# Altium PCB GPS track2_ar.PcbDoc (part 2 of 3)
Units mm, origin at the board's own origin, x right, y up, seen from the top; angles counter-clockwise.
Board outline 100 x 80 mm, 2 copper layers (Top Layer, Bottom Layer); 195 components, 113 nets, 611 pads, 306 vias.
Unrouted connection lines stored in the file: 1.
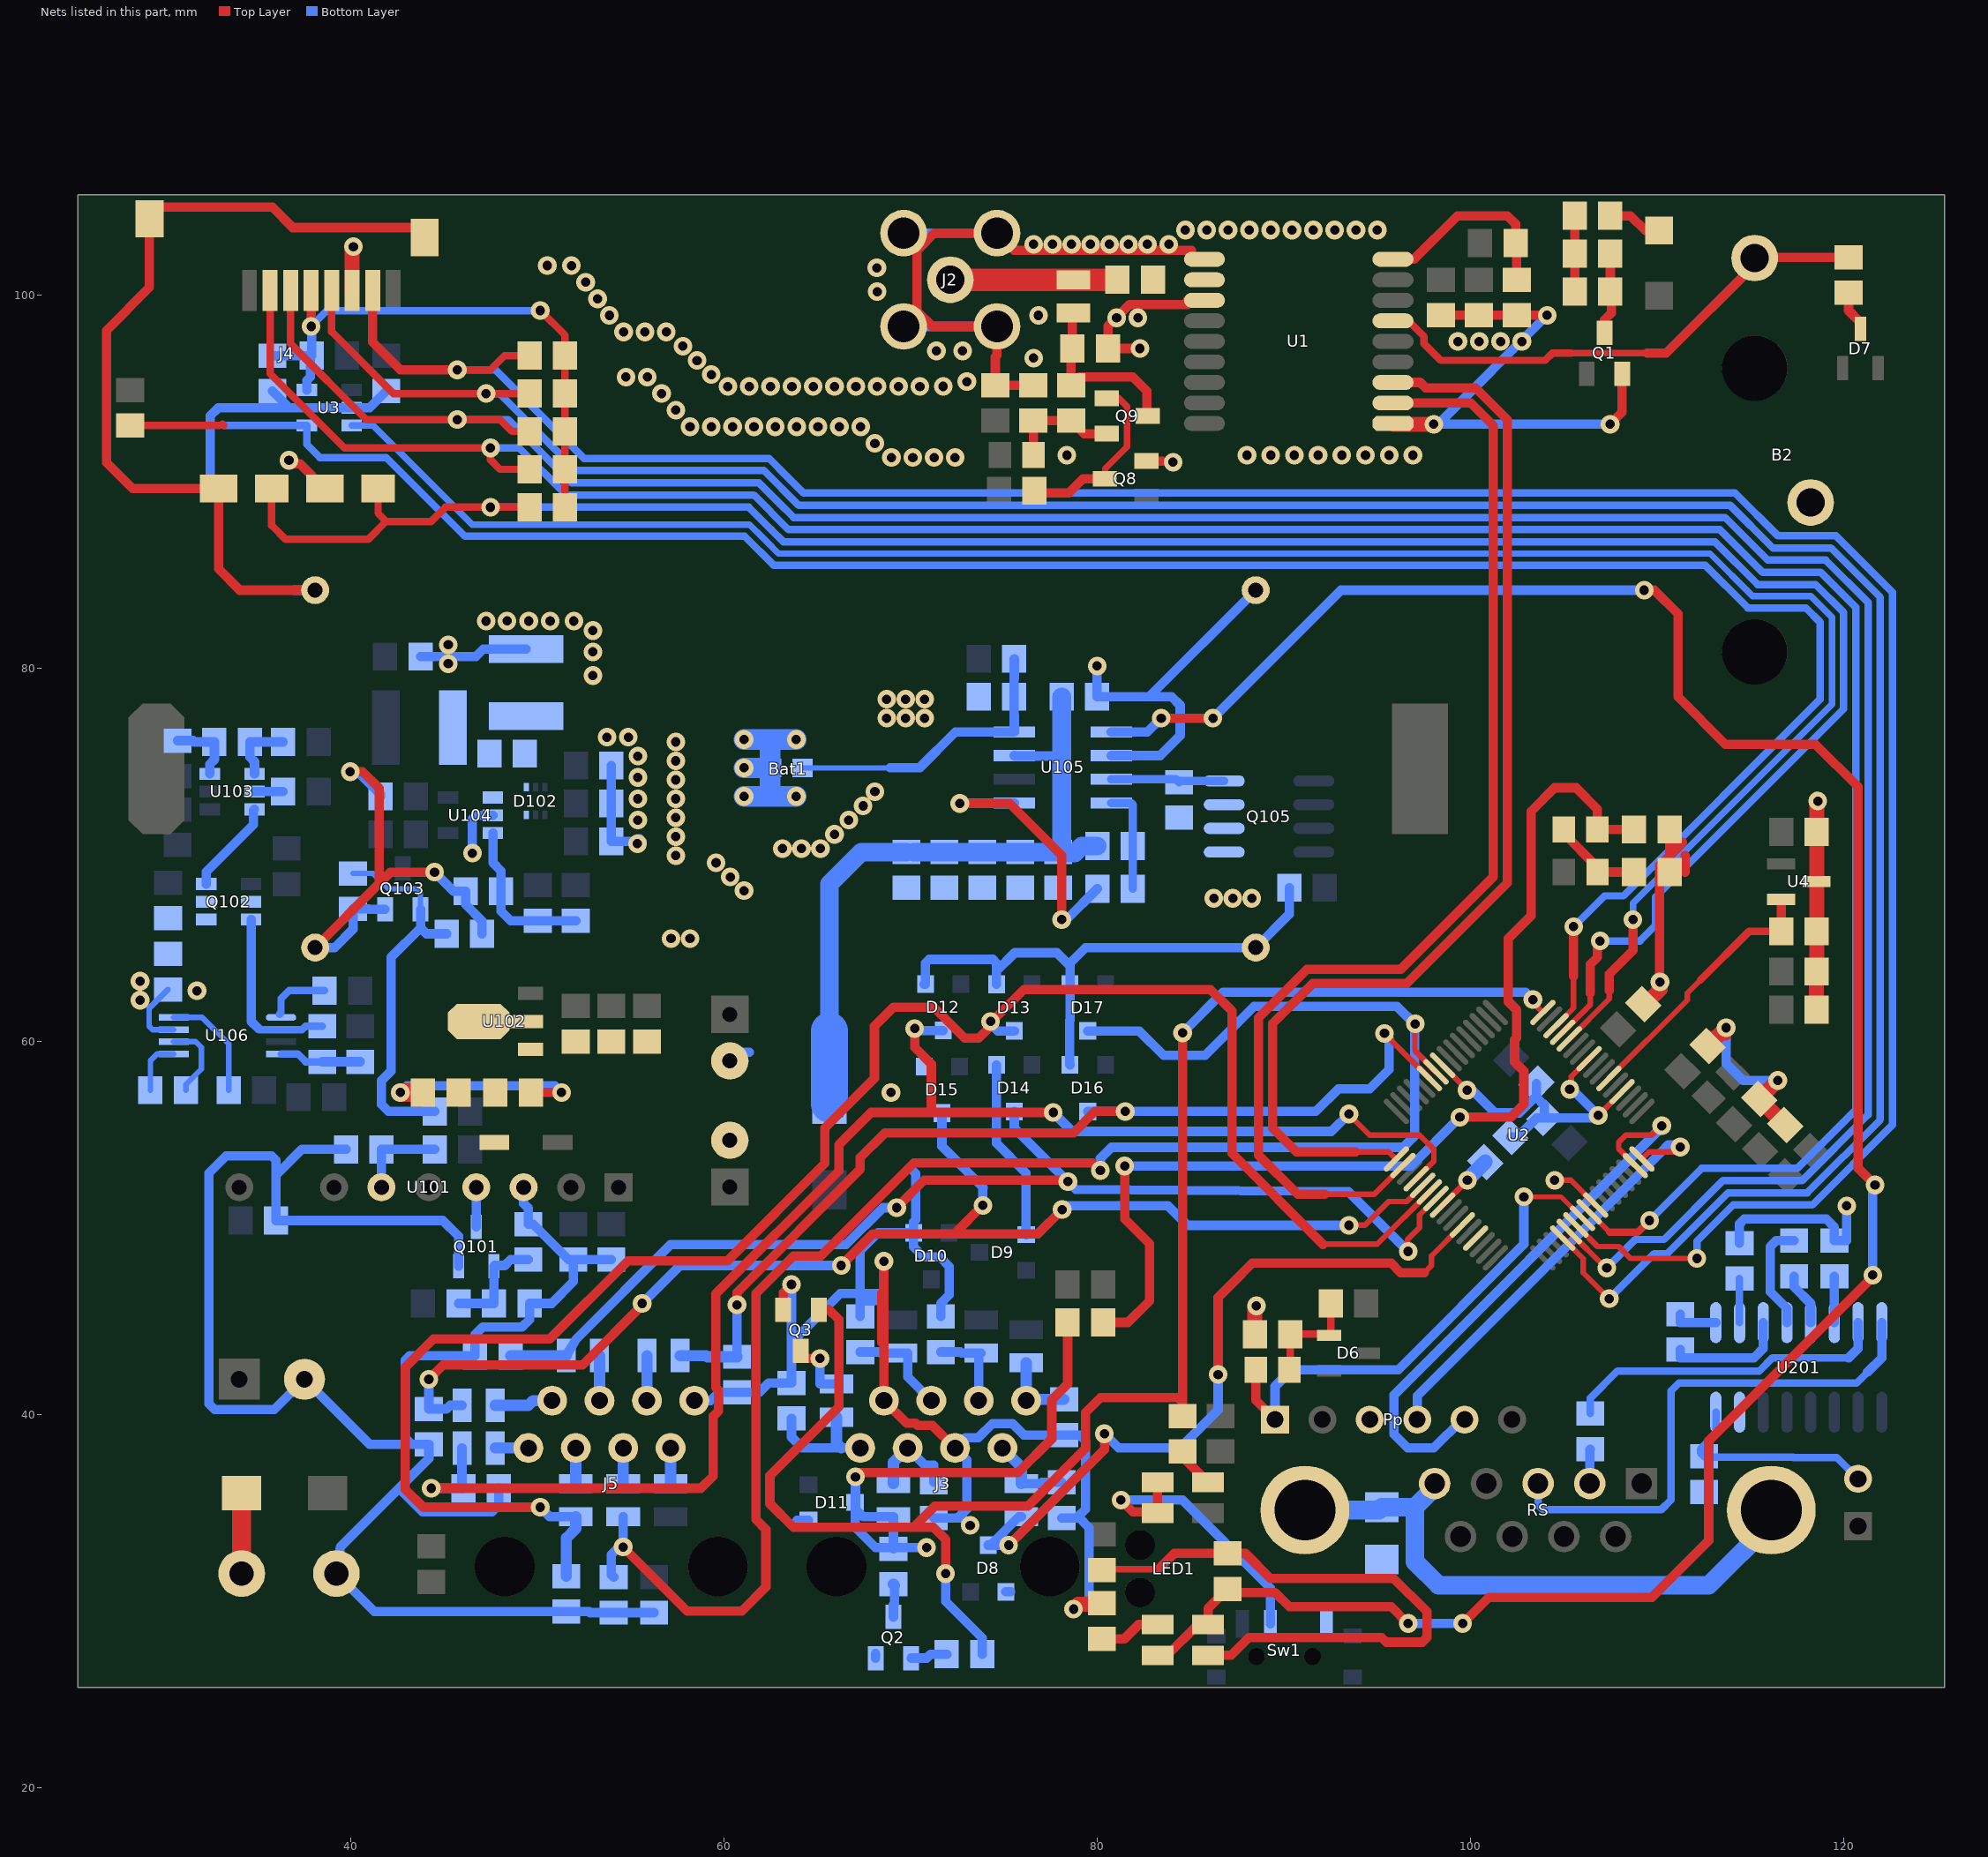
[diagram p2: the nets of this part, all layers, seen from the top]

## Via types
v1: diameter 1, hole 0.5, Top Layer to Bottom Layer, 306 vias

## Nets (pads, with @x,y where several pads share a name; then routed paths per layer and width w, separated by ;. In a path a pad name is that pad's centre, name@x,y a point inside that pad or via, vN(x,y) a via of type N, cw(c..) or ccw(c..) an arc to the next point about the centre after c; other vN are vias at no path point) (continued)
GND: B2.2 Bat1.MH C7.1 C8.1 C17.1 C18.1 C27.1 C30.2 C31.2 C32.1 C33.1 C34.1 C35.1 C36.1 C37.1 C38.1 C39.2 C40.2 C41.2 C42.2 C43.2 C44.2 C45.2 C46.2 C47.2 C48.2 C49.2 C50.2 C51.2 C52.2 C53.2 C54.2 C55.2 C101.2 C102.1 C103.1 C104.1 C105.2 C106.1 C107.1 C108.1 C109.1 C110.1 C111.1 C115.1 C116.1 C117.1 C118.1 C119.1 C121.1 C122.1 C132.1 C133.1 C139.2 C203.1 C204.1 C205.1 D8.1 D9.1 D10.1 D11.1 D12.1 D13.1 D14.1 D15.1 D16.1 D17.1 J2.2 J3.2 J3.5 J4.6 J4.10 J5.8 L102.1 NTC.2 Pp.3 Pwr.2 Q1.2 Q2.2 Q3.2 Q8.2 Q101.2 Q103.2 R42.2 R45.2 R48.1 R101.1 R103.1 R108.1 R117.1 R121.2 R122.2 R128.2 R201.2 Sw1.1 U1.1 U1.10 U1.12 U2.9 U2.20 U2.25 U2.41 U3.2 U4.3 U101.3 U102.1 U104.2 U105.6 U106.7 U201.15 | length 591.5
  Top Layer w0.3: U2.41@98.515,58.739 99.822,57.431 v1(99.822,57.404) ; v1(104.521,52.578) 105.383,52.578 U2.9@106.717,51.243 ; v1(105.328,57.449) 105.41,57.531 105.41,58.139 U2.25@106.364,59.092 ; v1(106.852,56.052) 106.855,56.048 U2.20@108.131,57.324 ; v1@110.146,63.463 v1@110.146,63.537 ; C35.1@112.378,60.108 C35.1@112.723,59.764
  Top Layer w0.5: v1(36.703,91.161) 36.703,90.983 37.28,90.983 38.608,89.655 J4.10@38.626,89.655 ; Bat1.MH@38.1,84.201 34.069,84.201 32.926,85.344 J4.10@32.926,89.655 28.321,89.655 26.924,91.052 26.924,98.12 29.226,100.422 J4.10@29.226,104.105 29.226,104.724 35.814,104.724 36.906,103.632 43.976,103.632 J4.10@43.976,103.105 ; v1(39.98,74.473) 40.64,74.473 41.529,73.584 41.529,68.478 ; v1(44.501,69.088) 42.139,69.088 41.529,68.478 ; C110.1@49.657,57.277 v1(51.308,57.277) ; Q3.2@63.185,45.634 63.185,46.548 v1(63.627,46.99) ; v1(68.58,48.235) 68.58,46.38 ; J3.5@72.39,38.227 71.171,39.446 70.383,39.446 70.282,39.548 69.799,39.548 J3.2@68.58,40.767 ; C27.1@76.581,95.184 C39.2@74.549,95.184 ; v1(82.296,97.155) C30.2@80.579,97.155 80.579,98.349 81.747,99.517 84.836,99.517 84.836,99.736 U1.12@85.755,99.736 ; U1.10@85.755,101.936 85.065,101.936 85.065,102.413 75.561,102.413 J2.2@74.636,103.338 71.283,103.338 70.46,102.514 70.358,102.413 70.358,99.162 70.409,99.111 71.182,98.338 J2.2@74.636,98.338 74.636,96.785 74.549,96.698 74.549,95.936 ; C7.1@98.425,98.933 C31.2@100.457,98.933 C8.1@102.489,98.933 v1(104.115,98.933) ; v1(107.493,93.091) 108.138,93.736 Q1.2@108.138,95.801 ; v1@110.146,63.537 110.146,69.093 110.146,69.455 110.231,69.54 110.678,69.987 111.371,70.681 ; C18.1@110.678,69.093 R48.1@110.678,71.374 ; 111.506,69.093 111.506,69.977 ; C35.1@112.378,60.108 112.596,60.325 C35.1@112.723,60.325 ; C35.1@112.723,59.764 C35.1@112.723,60.325 ; C41.2@118.557,71.247 118.557,72.837 118.557,72.898 118.557,73.162 118.567,73.152 118.567,72.898 v1@118.567,72.847 ; v1(118.618,72.898) v1@118.567,72.847 ; 41.529,68.478 Bat1.MH@38.1,65.049 41.529,68.478 ; J3.2@68.58,40.767 68.58,43.764 ; J3.2@68.58,40.767 68.58,43.764 ; 68.58,43.764 68.58,46.38 ; 68.58,43.764 68.453,43.891 68.453,46.507 68.58,46.38 ; 68.58,43.764 68.58,46.38 ; C39.2@74.549,95.184 74.549,95.936 ; C39.2@74.549,95.184 74.549,95.936 ; C35.1@112.723,60.325 113.284,60.325 ; C35.1@112.723,60.325 113.284,60.325 ; 113.284,60.325 113.71,60.325 113.284,60.325 ; R42.2@118.567,63.759 C42.2@118.567,65.913 ; R42.2@118.567,63.759 118.567,61.722 R42.2@118.567,63.759 ; R42.2@118.567,63.759 C42.2@118.567,65.913 ; C42.2@118.567,65.913 U4.3@118.567,68.58 ; C42.2@118.567,65.913 U4.3@118.567,68.58 ; U4.3@118.567,68.58 C41.2@118.567,71.247 ; U4.3@118.567,68.58 C41.2@118.567,71.247 ; C41.2@118.567,71.247 v1@118.567,72.847 ; C41.2@118.567,71.247 v1@118.567,72.847 ; Q8.2@82.634,91.12 83.505,91.12 Q8.2@82.634,91.12
  Top Layer w0.8: J4.6@40.086,100.255 40.086,102.543 v1(40.155,102.611) ; v1(78.74,29.591) 78.994,29.845 79.502,29.845 79.563,29.906 R117.1@80.264,29.906 ; C17.1@88.458,44.323 88.458,45.759 v1(88.542,45.842) ; U1.1@95.855,93.136 95.9,93.091 v1(98.044,93.091) ; C34.1@109.257,62.013 109.31,61.939 109.32,61.949 110.172,62.801 v1@110.109,62.865 ; C35.1@112.723,59.764 v1(113.71,60.751) ; v1(116.471,57.924) C132.1@115.48,56.933 R45.2@116.877,55.536 ; C40.2@118.552,61.722 R42.2@118.552,63.759 118.557,63.764 C42.2@118.557,65.913 U4.3@118.557,68.58 C41.2@118.557,71.247 118.557,72.837 v1(118.618,72.898)
  Top Layer w1: v1(42.672,57.277) C109.1@43.881,57.277
  Bottom Layer w0.3: R128.2@30.226,62.804 29.21,61.788 29.21,60.833 29.393,60.65 U106.7@30.526,60.65
  Bottom Layer w0.5: 32.487,89.814 32.487,93.548 32.918,93.98 35.814,93.98 36.708,93.98 ; C38.1@35.814,94.874 36.708,93.98 ; 36.982,84.201 Bat1.MH@38.1,84.201 ; Bat1.MH@38.1,65.049 39.141,65.049 40.132,66.04 C119.1@40.132,67.122 40.97,67.122 40.993,67.099 Q103.2@41.849,67.099 ; R103.1@39.756,54.229 37.389,54.229 36.002,52.842 ; v1(39.98,74.473) 40.386,74.473 41.595,73.264 C118.1@41.595,73.152 ; C37.1@41.91,94.874 41.016,93.98 U3.2@40.062,93.98 ; v1(42.672,57.277) 43.028,57.633 50.952,57.633 v1(51.308,57.277) ; C133.1@43.749,80.645 46.712,80.645 47.115,81.048 L102.1@49.403,81.048 ; v1(44.501,69.088) 45.517,68.072 R122.2@46.167,68.072 46.167,67.356 47.051,66.472 R108.1@47.051,65.786 ; Q101.2@45.786,47.972 45.786,49.581 44.948,50.419 C102.1@36.002,50.419 ; v1(46.533,70.104) 46.533,71.933 46.736,72.136 U104.2@47.625,72.136 ; C55.2@47.94,36.068 47.94,35.154 47.584,34.798 43.866,34.798 42.596,36.068 ; U101.3@49.276,52.197 49.276,51.333 49.53,51.079 C111.1@49.53,50.226 49.784,50.226 51.684,48.326 C104.1@51.943,48.326 ; C117.1@53.97,74.803 C115.1@53.97,72.771 C116.1@53.97,70.739 55.626,70.739 55.499,70.866 55.372,70.866 v1(55.372,70.612) ; C103.1@53.975,48.326 C104.1@51.943,48.326 ; C49.2@56.261,29.403 C51.2@54.102,29.403 52.842,29.403 52.781,29.464 C53.2@51.562,29.464 41.275,29.464 Pwr.2@39.243,31.496 39.446,32.918 42.596,36.068 ; J5.8@58.42,40.767 59.284,40.767 59.731,41.214 C50.2@60.706,41.214 61.9,41.214 62.403,41.717 C47.2@63.627,41.717 ; C105.2@60.325,58.968 60.793,59.436 61.366,59.436 ; v1(63.627,46.99) 63.627,43.891 ; 63.932,34.356 D11.1@64.536,34.356 ; Q2.2@68.138,26.967 Q2.2@68.138,27.203 ; v1(68.58,48.235) 68.58,46.38 68.453,46.507 ; J2.2@69.636,98.338 J2.2@74.636,98.338 ; J2.2@69.636,103.338 J2.2@74.636,103.338 ; 69.952,53.264 70.282,52.934 70.282,50.455 70.17,50.343 D10.1@70.17,49.764 ; D12.1@70.739,63.068 70.805,63.068 D12.1@70.805,63.099 70.805,64.211 71.008,64.414 74.412,64.414 74.615,64.211 74.615,63.795 ; C44.2@71.628,45.273 71.628,45.974 72.085,46.431 72.085,47.955 71.577,48.463 70.714,48.463 70.17,49.007 D10.1@70.17,49.764 ; v1(73.203,34.077) 72.796,34.483 72.558,34.483 ; D14.1@74.615,58.761 74.615,57.851 74.6,57.836 74.6,54.559 76.2,52.959 D9.1@76.2,49.657 ; D8.1@75.118,30.52 D8.1@75.362,30.52 ; C43.2@78.105,34.483 78.908,34.483 ; D16.1@78.552,58.761 78.552,58.776 78.537,58.776 78.537,61.148 78.552,61.163 D17.1@78.552,63.079 ; 79.273,29.769 79.578,30.074 79.578,33.95 79.045,34.483 78.908,34.483 ; v1(80.005,80.137) C121.1@80.005,78.486 ; U105.6@80.766,75.335 83.387,75.335 84.455,76.403 84.455,78.029 83.998,78.486 82.785,78.486 ; Bat1.MH@88.5,84.201 82.785,78.486 ; C122.1@90.297,68.26 90.297,66.846 Bat1.MH@88.5,65.049 79.39,65.049 78.552,64.211 78.552,64.059 ; v1(99.822,57.404) 100.101,57.404 101.32,56.186 102.624,56.186 C32.1@103.542,57.103 ; C36.1@102.145,54.901 102.54,54.901 103.556,55.917 C33.1@103.976,55.917 ; v1(104.115,98.933) v1@98.273,93.091 ; v1(105.328,57.449) 105.455,57.449 v1(106.852,56.052) 106.717,55.917 C33.1@103.976,55.917 ; v1(107.493,93.091) v1@98.273,93.091 ; v1(113.71,60.751) 113.71,58.832 114.618,57.924 v1(116.471,57.924) ; C203.1@114.427,49.21 114.427,50.241 114.681,50.495 119.075,50.495 119.507,50.063 C204.1@119.507,49.337 ; v1(120.167,51.206) C204.1@120.167,49.337 ; C102.1@36.002,50.419 36.002,52.842 ; C102.1@36.002,50.419 36.002,52.842 ; 36.002,52.842 36.002,53.645 35.773,53.873 33.325,53.873 32.41,52.959 32.41,40.589 32.715,40.284 35.91,40.284 C101.2@37.536,41.91 41.026,38.42 43.282,38.42 ; 36.708,93.98 U3.2@40.062,93.98 ; 36.708,93.98 U3.2@40.062,93.98 ; 42.596,36.068 44.196,37.668 ; 42.596,36.068 44.196,37.668 ; 43.282,38.42 42.926,38.776 42.926,42.926 43.18,43.18 C52.2@46.675,43.18 46.675,44.298 47.081,44.704 49.185,44.704 49.591,45.11 R101.1@49.591,45.974 50.775,45.974 51.943,47.142 C104.1@51.943,48.326 ; 43.282,38.42 C54.2@44.196,38.42 ; 43.282,38.42 C54.2@44.196,38.42 ; 44.196,37.668 C54.2@44.196,38.42 ; C47.2@63.627,41.717 63.627,43.891 ; C47.2@63.627,41.717 63.627,43.891 ; 63.627,43.891 66.243,46.507 68.453,46.507 ; 67.31,46.101 67.31,46.507 67.31,48.799 68.275,49.764 D10.1@70.17,49.764 ; 67.31,46.101 C45.2@67.31,45.273 67.31,46.101 ; 67.31,46.101 68.047,46.101 68.453,46.507 ; 72.558,34.483 73.025,34.95 73.025,37.592 J3.5@72.39,38.227 72.949,38.786 73.645,38.786 74.39,39.531 75.47,39.531 76.073,38.928 C48.2@78.232,38.928 79.055,38.928 79.375,38.608 79.375,34.95 78.908,34.483 ; 72.558,34.483 C46.2@71.247,34.483 72.558,34.483 ; 74.615,63.795 75.59,64.77 77.841,64.77 78.552,64.059 ; 74.615,63.795 D13.1@74.615,63.079 74.615,63.795 ; D17.1@78.552,63.079 78.552,64.059 ; D17.1@78.552,63.079 78.552,64.059 ; C121.1@80.005,78.486 82.785,78.486 ; C121.1@80.005,78.486 82.785,78.486 ; v1@98.273,93.091 v1(98.044,93.091) v1@98.273,93.091 ; C32.1@103.542,57.103 C32.1@103.542,57.748 C32.1@103.542,57.103 ; C32.1@103.542,57.103 103.542,57.026 103.976,56.591 C33.1@103.976,55.917 ; C204.1@119.507,49.337 C204.1@120.167,49.337 ; C204.1@119.507,49.337 C204.1@120.167,49.337
  Bottom Layer w1.1: v1(61.087,73.152) 62.484,73.152 ; v1(61.087,74.676) NTC.2@62.523,74.676 ; v1(61.087,76.2) 62.484,76.2 ; v1(63.881,73.152) 62.484,73.152 ; v1(63.881,76.2) 62.484,76.2 ; 62.484,73.152 62.484,74.637 NTC.2@62.523,74.676 ; 62.484,76.2 62.484,74.715 NTC.2@62.523,74.676
  other v1: 68.961,57.277 28.725,62.225 31.773,62.733 110.16,63.203 28.725,63.241 57.173,65.527 58.189,65.527 86.256,67.686 87.272,67.686 88.288,67.686 61.087,68.097 60.348,68.829 59.586,69.591 57.427,69.972 63.142,70.353 64.158,70.353 65.174,70.353 57.427,70.988 65.936,71.115 55.395,71.877 66.698,71.877 57.427,72.004 67.46,72.639 55.395,73.02 57.427,73.02 68.095,73.401 57.427,74.036 55.395,74.163 57.427,75.052 55.395,75.306 57.427,76.068 53.744,76.322 54.887,76.322 68.73,77.338 69.746,77.338 70.762,77.338 68.73,78.354 69.746,78.354 70.762,78.354 52.982,79.624 45.235,80.259 52.982,80.894 45.235,81.275 52.982,82.037 47.267,82.545 48.387,82.55 49.553,82.545 50.696,82.545 51.966,82.545 84.074,91.059 68.984,91.308 70.127,91.308 71.27,91.308 72.39,91.313 78.382,91.435 88.034,91.435 89.304,91.435 90.574,91.435 91.844,91.435 93.114,91.435 94.384,91.435 95.654,91.435 96.924,91.435 68.095,92.07 58.189,92.959 59.332,92.959 60.475,92.959 61.618,92.959 62.761,92.959 63.904,92.959 65.047,92.959 66.19,92.959 67.333,92.959 57.427,93.848 56.665,94.737 60.221,95.118 61.364,95.118 62.507,95.118 63.65,95.118 64.793,95.118 65.936,95.118 67.079,95.118 68.222,95.118 69.365,95.118 70.508,95.118 71.755,95.123 73.025,95.377 54.76,95.626 55.903,95.626 59.332,95.753 58.57,96.515 76.604,96.642 71.397,97.023 72.794,97.023 57.808,97.277 99.337,97.531 100.48,97.531 101.623,97.531 102.766,97.531 54.633,98.039 55.776,98.039 56.919,98.039 81.049,98.801 82.192,98.801 53.871,98.928 76.858,98.928 53.236,99.817 68.222,100.198 52.601,100.706 68.199,101.473 50.546,101.6 51.839,101.595 76.604,102.738 77.62,102.738 78.636,102.738 79.652,102.738 80.668,102.738 81.684,102.738 82.7,102.738 83.843,102.738 84.732,103.5 85.875,103.5 87.018,103.5 88.161,103.5 89.304,103.5 90.447,103.5 91.59,103.5 92.733,103.5 93.876,103.5 95.019,103.5
GPS_LED: D8.3 L6.1 U2.59 | length 40.3
  Top Layer w0.3: 87.304,47.112 87.376,47.04 ; 97.536,47.598 97.536,47.625 97.917,48.006 97.917,48.524 U2.59@99.575,50.183
  Top Layer w0.5: v1(75.264,33.02) 80.391,38.147 v1(80.391,38.989) ; v1(86.487,42.164) 86.487,46.295 87.304,47.112 88.325,48.133 95.758,48.133 96.266,47.625 97.536,47.625
  Bottom Layer w0.5: D8.3@74.168,33.02 D8.3@74.295,33.02 ; v1(75.264,33.02) D8.3@74.295,33.02 ; L6.1@75.946,34.544 75.819,34.544 D8.3@74.295,33.02 ; v1(80.391,38.989) 81.153,38.227 84.455,38.227 86.487,40.259 v1(86.487,42.164)
GREENLED: U2.61
LCD_DAT_4: C55.1 D12.3 L8.1 U2.52 | length 82.6
  Top Layer w0.3: v1(93.495,56.129) 93.599,56.007 94.615,54.991 97.282,54.991 98.044,54.229 98.044,53.601 U2.52@97.101,52.658
  Top Layer w0.5: v1(44.323,36.068) 58.776,36.068 59.423,36.715 59.423,39.925 59.724,40.227 59.724,41.307 59.563,41.468 59.563,46.482 66.167,53.086 66.167,54.483 67.894,56.21 71.12,56.21 ; v1(70.231,60.706) 70.231,59.69 71.12,58.801 71.12,56.21 ; v1(77.648,56.21) 71.12,56.21
  Bottom Layer w0.5: v1(70.231,60.706) 70.338,60.599 D12.3@71.755,60.599 ; v1(77.648,56.21) 78.664,55.194 92.56,55.194 v1(93.495,56.129)
  Bottom Layer w0.508: v1(44.323,36.068) C55.1@46.04,36.068 45.973,36.135 L8.1@45.973,38.227
LCD_DAT_5: C54.1 D15.3 L9.1 U2.53 | length 70.1
  Top Layer w0.3: v1(93.495,50.16) 93.599,50.165 94.361,50.165 95.631,51.435 96.585,51.435 U2.53@97.454,52.304
  Top Layer w0.5: v1(44.196,41.91) 44.958,42.672 52.426,42.672 55.728,45.974 v1(55.626,45.974) ; v1(66.294,48.006) 67.996,49.708 72.365,49.708 ; v1(73.883,51.226) 72.365,49.708 ; v1(78.13,51.003) 76.835,49.708 72.365,49.708
  Bottom Layer w0.5: v1(55.626,45.974) 57.658,48.006 v1(66.294,48.006) ; D15.3@71.689,56.174 71.689,54.397 73.901,52.184 73.883,52.166 v1(73.883,51.226) ; v1(78.13,51.003) 78.331,51.204 83.792,51.204 84.836,50.16 v1(93.495,50.16)
  Bottom Layer w0.508: v1(44.196,41.91) C54.1@44.196,40.32 45.146,40.32 45.339,40.513 L9.1@45.973,40.513
LCD_DAT_6: C53.1 D13.3 L10.1 U2.54 | length 99.9
  Top Layer w0.3: 92.098,49.149 95.006,49.149 U2.54@97.808,51.95
  Top Layer w0.5: v1(50.165,35.052) 43.891,35.052 42.926,36.017 42.926,42.545 44.45,44.069 50.673,44.069 54.864,48.26 60.198,48.26 65.413,53.475 65.413,55.38 68.072,58.039 68.072,60.833 69.088,61.849 71.247,61.849 72.898,60.198 73.66,60.198 74.295,60.833 v1(74.295,61.087) ; v1@74.333,61.049 76.073,62.789 86.081,62.789 87.224,61.646 87.224,54.018 92.098,49.144
  Bottom Layer w0.5: v1(50.165,35.052) 50.674,34.543 L10.1@52.07,34.543 ; v1@74.27,60.985 74.676,60.579 D13.3@75.565,60.579
  Bottom Layer w0.6: C53.1@51.562,31.364 51.562,33.401 52.07,33.909 L10.1@52.07,34.543
LCD_DAT_7: C52.1 D14.3 L11.1 U2.55 | length 62
  Top Layer w0.3: v1(96.67,48.763) 96.647,48.768 96.647,49.403 97.282,50.038 97.282,50.718 U2.55@98.161,51.597
  Top Layer w0.5: v1(69.266,51.105) 70.739,52.578 v1@78.435,52.578
  Bottom Layer w0.5: L11.1@51.561,43.18 52.121,44.094 57.15,49.124 66.548,49.124 68.529,51.105 v1(69.266,51.105) ; D14.3@75.565,56.261 75.565,55.372 v1(78.435,52.502) 78.86,52.077 93.475,51.958 v1(96.67,48.763)
  Bottom Layer w0.6: C52.1@48.575,43.18 L11.1@51.561,43.18
LCD_E: C51.1 D17.3 L12.1 U2.42 | length 100.2
  Top Layer w0.3: v1(97.051,60.955) 97.028,60.833 97.028,59.518 U2.42@98.161,58.385
  Top Layer w0.5: v1(54.61,32.918) 58.039,29.489 60.96,29.489 62.255,30.785 62.255,33.857 61.717,34.396 61.717,46.503 63.728,48.514 65.202,48.514 70.193,53.506 79.769,53.506 v1(80.176,53.099)
  Bottom Layer w0.5: v1(54.61,32.918) 54.61,33.147 L12.1@54.61,34.543 ; D17.3@79.502,60.579 82.257,60.579 83.566,59.27 85.789,59.27 88.419,61.9 96.063,61.9 ; v1(80.176,53.099) 80.176,53.748 80.772,54.344 96.406,54.344 97.028,54.966 97.028,60.935 96.063,61.9 ; v1(97.051,60.955) 96.063,61.9
  Bottom Layer w0.508: C51.1@54.102,31.303 53.975,31.43 53.975,32.512 54.61,33.147 L12.1@54.61,34.543
LCD_RS: C50.1 D16.3 L13.1 U2.43 | length 54.2
  Top Layer w0.3: v1(95.4,60.447) 95.514,60.325 U2.43@97.808,58.032
  Top Layer w0.5: v1(60.706,45.898) 60.706,46.559 67.31,53.163 67.31,53.789 68.639,55.118 78.74,55.118 79.883,56.261 v1(81.509,56.261)
  Bottom Layer w0.5: C50.1@60.706,43.114 v1(60.706,45.898) ; D16.3@79.502,56.261 v1(81.509,56.261) 91.719,56.261 92.939,57.48 94.615,57.48 95.656,58.522 95.656,60.19 v1(95.4,60.447)
  Bottom Layer w0.6: L13.1@57.659,43.18 59.055,43.18 59.121,43.114 C50.1@60.706,43.114
M\C\L\R\: Pp.1 R13.2 U2.7 | length 27.5
  Top Layer w0.254: v1(102.87,51.689) 104.857,51.689 U2.7@106.01,50.536
  Top Layer w0.5: R13.2@88.508,42.418 88.508,40.778 Pp.1@89.535,39.751
  Bottom Layer w0.5: Pp.1@89.535,39.751 89.535,41.529 90.424,42.418 96.139,42.418 102.87,49.149 v1(102.87,51.689)
M_GND: C114.1 C125.1 Q102.1 R128.1 U106.2 | length 9.5
  Bottom Layer w0.4: 35.052,60.706 35.108,60.65 U106.2@36.276,60.65 37.409,60.65 37.592,60.833 38.476,60.833 C125.1@38.481,60.828
  Bottom Layer w0.5: Q102.1@34.671,66.553 34.671,61.087 35.052,60.706
MIC: C20.1 D11.3 L3.1 R18.2 | length 31
  Top Layer w0.5: v1(67.056,36.678) 67.285,36.906 75.768,36.906 77.576,38.714 77.576,40.807 78.425,41.655 C20.1@78.425,44.958
  Bottom Layer w0.5: D11.3@67.036,35.306 67.036,33.985 68.128,32.893 69.088,32.893 R18.2@69.154,32.893 ; v1(67.056,36.678) 67.056,35.306 67.056,34.949 67.462,34.543 L3.1@69.088,34.543 R18.2@69.088,32.827 R18.2@69.154,32.893 ; R18.2@69.154,32.893 v1(70.866,32.893) R18.2@69.154,32.893
NetB2_1: B2.1 R6.1 U1.6 | length 28
  Top Layer w0.35: 105.41,96.901 109.474,96.901
  Top Layer w0.4: U1.6@95.855,98.636 96.679,98.636 97.525,97.79 97.525,97.402 98.411,96.516 104.009,96.516 104.394,96.901 105.41,96.901
  Top Layer w0.5: 109.474,96.901 110.49,96.901 115.237,101.648 B2.1@115.237,102 115.279,102.042 R6.1@120.269,102.042
NetC8_2: C8.2 R5.1 U1.9 | length 10.7
  Top Layer w0.5: U1.9@95.855,101.936 96.983,101.936 99.314,104.267 101.981,104.267 102.423,103.825 R5.1@102.423,102.804 102.489,102.738 C8.2@102.489,100.833
NetC17_2: C17.2 D6.1 R13.1 R14.2 | length 5.8
  Top Layer w0.4: R13.1@90.308,42.418 90.358,42.468 C17.2@90.358,44.323 92.356,44.323 D6.1@92.422,44.257 92.522,44.357 R14.2@92.522,45.974
NetC18_2: C18.2 R12.1 R16.2 | length 5
  Top Layer w0.5: R16.2@105.007,71.374 105.007,71.161 106.818,69.35 R12.1@106.818,69.093 C18.2@108.778,69.093
NetC20_2: C20.2 R16.1 R48.2 | length 57.7
  Top Layer w0.5: C20.2@80.325,44.958 81.661,44.958 82.804,46.101 82.804,49.176 81.483,50.497 v1(81.483,53.34) ; v1(99.441,55.956) 102.183,55.956 102.87,56.643 102.87,58.42 102.374,58.916 102.374,60.106 102.489,60.221 102.489,61.697 102.04,62.146 102.04,65.54 103.251,66.751 103.251,72.339 104.521,73.609 105.664,73.609 106.807,72.466 R16.1@106.807,71.374 R48.2@108.778,71.374
  Bottom Layer w0.5: v1(81.483,53.34) 96.825,53.34 v1(99.441,55.956)
NetC27_2: C27.2 FB1.2 Q9.2 R39.1 | length 6.1
  Top Layer w0.5: FB1.2@76.592,91.44 76.592,93.273 C27.2@76.581,93.284 R39.1@78.613,93.284 79.314,92.583 Q9.2@80.518,92.583
NetC28_1: C28.1 Q1.3 R34.2 | length 4.4
  Top Layer w0.5: Q1.3@107.188,98.001 107.188,98.679 107.569,99.06 107.569,100.137 C28.1@107.503,100.203 R34.2@107.503,102.235
NetC28_2: C28.2 R8.1 R34.1 | length 4.1
  Top Layer w0.5: C28.2@105.603,100.203 R34.1@105.603,102.235 R8.1@105.603,104.267
NetC29_1: C29.1 J2.1 L1.2 | length 9
  Top Layer w1.2: J2.1@72.136,100.838 J2.1@72.136,100.838 L1.2@78.74,100.839 L1.2@78.74,100.839 C29.1@81.092,100.838
NetC29_2: C29.2 U1.11
NetC30_1: C30.1 L1.1 Q9.3 R39.2 | length 9.8
  Top Layer w0.5: L1.1@78.74,99.059 78.679,98.998 C30.1@78.679,97.155 78.613,97.089 R39.2@78.613,95.184 79.06,95.631 81.915,95.631 82.677,94.869 82.677,93.574 Q9.3@82.718,93.533
NetC36_2: C36.2 U2.56 | length 3.3
  Top Layer w0.3: U2.56@98.515,51.243 v1(99.845,52.573)
  Bottom Layer w0.8: v1(99.845,52.573) 99.831,52.587 C36.2@100.801,53.557
NetC38_2: C38.2 J4.4 R35.1 R36.1 R37.1 R38.1 R41.2 R46.2 U3.5 | length 31.2
  Top Layer w0.4: v1(50.165,99.187) 51.496,97.856 R36.1@51.496,96.774 R41.2@51.496,94.742 R37.1@51.496,92.71 R38.1@51.496,90.678 R35.1@51.496,88.646
  Top Layer w0.5: v1(37.886,98.338) J4.4@37.886,100.255
  Bottom Layer w0.4: v1@37.912,98.232 v1(37.886,98.338) 38.735,99.187 v1(50.165,99.187)
  Bottom Layer w0.5: C38.2@35.814,96.774 37.78,96.774 R46.2@37.846,96.708 ; U3.5@37.662,94.93 37.662,95.447 37.846,95.631 R46.2@37.846,96.708 ; v1@37.912,98.232 R46.2@37.912,96.774 R46.2@37.846,96.708
NetC43_1: C43.1 J3.7 L6.2 | length 4.5
  Bottom Layer w0.5: L6.2@75.946,36.324 76.987,36.324 77.046,36.383 C43.1@78.105,36.383
  Bottom Layer w0.6: J3.7@74.93,38.227 75.946,37.211 L6.2@75.946,36.324
NetC44_1: C44.1 J3.6 L5.2 | length 4.9
  Bottom Layer w0.5: C44.1@71.628,43.373 72.669,43.373 72.736,43.306 L5.2@73.66,43.306 ; J3.6@73.66,40.767 L5.2@73.66,43.306 ; L5.2@73.66,43.306 L5.2@73.787,43.306 L5.2@73.66,43.306
NetC45_1: C45.1 J3.4 L4.2 | length 5.6
  Bottom Layer w0.5: C45.1@67.31,43.373 68.351,43.373 68.418,43.306 L4.2@69.469,43.306 69.85,43.306 69.85,42.037 J3.4@71.12,40.767
NetC46_1: C46.1 J3.3 L3.2 | length 4.9
  Bottom Layer w0.5: J3.3@69.85,38.227 70.764,37.313 71.247,37.313 C46.1@71.247,36.383
  Bottom Layer w0.6: L3.2@69.088,36.323 69.088,37.465 J3.3@69.85,38.227
NetC47_1: C47.1 J3.1 L2.2 | length 6.7
  Bottom Layer w0.5: C47.1@63.627,39.817 63.627,38.811 64.211,38.227 66.294,38.227 J3.1@67.31,38.227
  Bottom Layer w0.6: L2.2@66.04,39.877 66.04,38.481 66.294,38.227
NetC48_1: C48.1 J3.8 L7.1 | length 4.1
  Bottom Layer w0.6: L7.1@76.2,42.798 J3.8@76.2,40.767 76.261,40.828 C48.1@78.232,40.828
NetC109_2: C109.2 C110.2 D105.2 U102.2 | length 2.5
  Top Layer w0.5: U102.2@46.873,61.087 U102.2@49.423,61.087
NetC111_2: C111.2 Q101.1 R101.2 R102.1 | length 5.9
  Bottom Layer w0.5: R102.1@45.781,45.974 R101.2@47.691,45.974 47.691,47.967 Q101.1@47.686,47.972 47.72,48.006 48.26,48.006 48.58,48.326 C111.2@49.53,48.326
NetC119_2: C119.2 Q103.1 R107.1 R108.2 | length 20.8
  Bottom Layer w0.3: C119.2@40.132,69.022 41.214,69.022 42.037,68.199 43.561,68.199 43.749,68.011 Q103.1@43.749,67.099
  Bottom Layer w0.5: Q103.1@43.749,67.099 43.749,66.106 ; R107.1@44.516,56.261 42.037,56.261 41.656,56.642 41.656,57.912 42.164,58.42 42.164,64.521 43.749,66.106 ; R108.2@45.151,65.786 44.069,65.786 43.749,66.106
NetC121_2: C121.2 D106.2 R110.2 R111.2 R112.2 R113.2 R114.2 R118.2 U105.3 | length 38
  Bottom Layer w0.5: R110.2@69.684,70.165 R110.2@69.784,70.165 R110.2@70.165,70.165 ; U105.3@75.566,75.335 75.59,75.311 78.105,75.311
  Bottom Layer w1: 65.659,60.579 65.659,68.453 67.371,70.165 R110.2@69.784,70.165 ; R110.2@70.165,70.165 R111.2@71.816,70.165 R112.2@73.848,70.165 R113.2@75.88,70.165 R114.2@77.912,70.165 R114.2@78.105,70.358 ; C121.2@78.105,78.486 78.105,75.311 R114.2@78.105,70.358 ; R118.2@80.01,70.485 79.182,70.485 78.801,70.104 78.359,70.104 R114.2@78.105,70.358
  Bottom Layer w2: D106.2@65.659,56.656 65.659,60.579
NetC123_1: C123.1 D102.1 L102.2
NetC123_2: C123.2 L101.2 U104.1
NetC124_1: C124.1 R122.1 R123.2 U104.3 | length 8.6
  Bottom Layer w0.5: U104.3@47.625,71.186 47.625,69.596 48.067,69.154 R122.1@48.067,68.072 48.067,66.995 48.575,66.487 C124.1@50.038,66.487 R123.2@52.07,66.487
NetC125_2: C125.2 R127.2 U106.4 | length 4.4
  Bottom Layer w0.4: U106.4@36.276,59.35 37.17,59.35 37.592,58.928 C125.2@38.481,58.928
  Bottom Layer w0.5: C125.2@38.481,58.928 R127.2@40.513,58.928
NetC126_1: C126.1 U106.6 | length 4.2
  Bottom Layer w0.3: U106.6@30.526,60 31.694,60 32.004,59.69 32.004,58.547 31.176,57.719 C126.1@31.176,57.404
NetC126_2: C126.2 U106.5 | length 3
  Bottom Layer w0.3: C126.2@29.276,57.404 29.276,58.994 29.632,59.35 U106.5@30.526,59.35
NetC201_1: C201.1 U201.3 | length 6.5
  Bottom Layer w0.5: C201.1@111.252,43.5 111.252,43.058 115.194,43.058 115.697,43.561 U201.3@115.697,44.945
NetC201_2: C201.2 U201.1 | length 2.4
  Bottom Layer w0.5: C201.2@111.252,45.4 111.252,44.958 111.265,44.945 U201.1@113.157,44.945
NetC202_1: C202.1 U201.5 | length 2.9
  Bottom Layer w0.5: C202.1@117.348,47.437 117.348,46.863 118.237,45.974 U201.5@118.237,44.945
NetC202_2: C202.2 U201.4 | length 5.8
  Bottom Layer w0.5: U201.4@116.967,44.945 116.967,45.705 116.078,46.594 116.078,49.022 116.393,49.337 C202.2@117.348,49.337
NetC203_2: C203.2 U201.2 | length 2.4
  Bottom Layer w0.4: U201.2@114.427,44.945 C203.2@114.427,47.31
NetC204_2: C204.2 U201.6 | length 2.5
  Bottom Layer w0.5: U201.6@119.507,44.945 C204.2@119.507,47.437
NetC205_2: C205.2 PwRS.2 U201.16 | length 11.5
  Bottom Layer w0.4: U201.16@113.157,40.145 113.157,38.989 112.334,38.166 112.334,37.973 C205.2@112.522,37.78 112.568,37.734 117.301,37.734 117.316,37.719 119.634,37.719 PwRS.2@120.777,36.576
NetD2_2: D2.2 R8.2 | length 2.9
  Top Layer w0.5: R8.2@107.503,104.267 108.585,104.267 109.375,103.477 D2.2@110.109,103.477
NetD7_3: D7.3 R6.2 | length 2.2
  Top Layer w0.5: R6.2@120.269,100.142 120.269,99.187 120.904,98.552 D7.3@120.904,98.205
NetD101_1: D101.1 Pwr.1 | length 4.3
  Top Layer w1: Pwr.1@34.163,31.496 D101.1@34.163,35.814
NetJ5_1: J5.1 L8.2 | length 1.8
  Bottom Layer w0.6: L8.2@47.753,38.227 J5.1@49.53,38.227
NetJ5_2: J5.2 L9.2 | length 3.2
  Bottom Layer w0.6: L9.2@47.753,40.513 49.53,40.513 49.784,40.767 J5.2@50.8,40.767
NetJ5_3: J5.3 L10.2 | length 1.9
  Bottom Layer w0.6: L10.2@52.07,36.323 J5.3@52.07,38.227
NetJ5_4: J5.4 L11.2 | length 2.4
  Bottom Layer w0.6: J5.4@53.34,40.767 L11.2@53.341,43.18 L11.2@53.341,43.18
NetJ5_5: J5.5 L12.2 | length 1.9
  Bottom Layer w0.6: L12.2@54.61,36.323 J5.5@54.61,38.227
NetJ5_6: J5.6 L13.2 | length 2.4
  Bottom Layer w0.6: L13.2@55.879,43.18 L13.2@55.879,43.18 J5.6@55.88,40.767
NetJ5_7: J5.7 L14.2 | length 1.9
  Bottom Layer w0.6: L14.2@57.15,36.323 J5.7@57.15,38.227
NetLED1_1d: LED1.1d R117.2 | length 3.3
  Top Layer w0.5: R117.2@80.264,28.006 81.473,28.006 82.232,28.765 LED1.1d@83.246,28.765 LED1.1d@83.244,28.763
NetLED1_1u: LED1.1u LED1.3u Sw1.2 | length 15.8
  Top Layer w0.5: v1(81.28,35.433) 81.915,34.798 83.183,34.798 LED1.3u@83.246,34.735 LED1.1u@83.246,36.385
  Bottom Layer w0.5: v1(81.28,35.433) 84.582,35.433 89.293,30.722 Sw1.2@89.293,28.801
NetLED1_2d: LED1.2d LED1.3d R130.1 U105.5 | length 128.6
  Top Layer w0.5: LED1.3d@83.246,27.115 83.757,27.115 85.407,28.765 LED1.2d@85.946,28.765 85.946,29.624 R130.1@86.995,30.673 ; v1(83.439,77.343) v1(86.208,77.343) ; R130.1@86.934,30.734 R130.1@86.995,30.673 ; v1@96.647,28.829 95.758,29.718 90.297,29.718 89.527,30.488 87.18,30.488 R130.1@86.995,30.673 ; v1(99.591,28.824) 100.992,30.226 109.728,30.226 112.776,33.274 112.776,38.608 v1@121.539,47.371 ; v1(109.322,84.201) 109.855,84.201 111.125,82.931 111.125,78.486 113.665,75.946 118.491,75.946 120.777,73.66 120.777,53.231 v1(121.689,52.319)
  Bottom Layer w0.5: U105.5@80.766,76.605 82.701,76.605 v1(83.439,77.343) ; v1(86.208,77.343) 93.066,84.201 v1(109.322,84.201) ; v1(96.67,28.824) 99.055,28.824 99.06,28.829 v1@99.568,28.829 ; v1(121.562,47.493) 121.562,52.22 v1@121.666,52.324
NetLED1_2u: LED1.2u R19.2 | length 2.2
  Top Layer w0.5: R19.2@84.582,38.039 84.582,37.749 LED1.2u@85.946,36.385
NetLED1_4d: LED1.4d R116.1 R130.2 | length 32.8
  Top Layer w0.35: R116.1@80.305,31.73 83.292,31.73
  Top Layer w0.5: R116.1@80.264,31.689 R116.1@80.305,31.73 ; 83.292,31.73 84.135,32.573 R130.2@86.995,32.573 87.95,32.573 89.281,31.242 95.885,31.242 97.674,29.453 97.674,28.078 97.416,27.82 95.497,27.82 95.25,28.067 88.138,28.067 87.186,27.115 LED1.4d@85.946,27.115
NetNTC_1: NTC.1 R120.2 R121.1 U105.4 | length 16.1
  Bottom Layer w0.3: NTC.1@64.223,74.676 68.919,74.676
  Bottom Layer w0.5: 68.919,74.676 70.485,74.676 72.414,76.605 U105.4@75.566,76.605 75.566,77.521 75.56,77.527 R121.1@75.56,78.486 75.56,79.477 75.565,79.482 R120.2@75.565,80.518
NetQ2_1: Q2.1 R49.1 | length 2
  Bottom Layer w0.5: Q2.1@70.038,26.967 70.866,26.967 71.077,27.178 R49.1@71.948,27.178
NetQ8_3: Q8.3 Q9.1 R33.2 | length 9.8
  Top Layer w0.35: Q8.3@80.434,90.17 80.434,90.721 81.597,91.884 81.597,94.044 81.153,94.488 81.148,94.483 Q9.1@80.518,94.483
  Top Layer w0.5: R33.2@76.642,89.535 76.769,89.408 78.486,89.408 79.248,90.17 Q8.3@80.434,90.17
NetQ101_3: Q101.3 U101.4 | length 2.1
  Bottom Layer w0.5: Q101.3@46.736,50.072 U101.4@46.736,52.197
NetQ102_2: Q102.2 U103.6 | length 5.1
  Bottom Layer w0.5: Q102.2@32.271,68.453 32.271,69.101 34.798,71.628 34.798,72.399 U103.6@34.855,72.456
NetQ105_1: Q105.1 Q105.2 Q105.3 R110.1 R111.1 R112.1 R113.1 R114.1 R115.1 R119.2 U105.1 | length 15.6
  Top Layer w0.5: v1(72.644,72.771) 75.311,72.771 78.105,69.977 v1(78.105,66.548)
  Bottom Layer w0.5: v1@72.644,72.795 U105.1@75.566,72.795 ; v1(78.105,66.548) 78.359,66.548 R119.2@80.01,68.199
NetQ105_4: Q105.4 R115.2 U105.7 | length 6.1
  Bottom Layer w0.45: U105.7@80.766,74.065 84.233,74.065 R115.2@84.389,73.909 84.455,73.975 Q105.4@86.815,73.975
NetR103_2: R103.2 R124.2 U101.6 | length 4.9
  Bottom Layer w0.5: U101.6@41.656,52.197 R103.2@41.656,54.229 R124.2@44.516,54.229
NetR104_1: R104.1 R105.2 U103.4 | length 3.6
  Bottom Layer w0.508: U103.4@34.855,74.356 34.855,75 34.605,75.25 R105.2@34.605,76.073 R104.1@36.388,76.073
NetR105_1: R105.1 R106.2 U103.3 | length 3.8
  Bottom Layer w0.508: R106.2@30.734,76.134 31.562,76.134 31.623,76.073 R105.1@32.705,76.073 32.705,75.123 32.455,74.873 U103.3@32.455,74.356
NetR118_1: R118.1 R119.1 U105.8 | length 5.7
  Bottom Layer w0.45: U105.8@80.766,72.795 81.825,72.795 81.91,72.71 R118.1@81.91,70.485 R119.1@81.91,68.199
NetR125_2: R125.2 U103.5 | length 1.5
  Bottom Layer w0.5: U103.5@34.855,73.406 R125.2@36.388,73.406
NetR126_2: R126.2 U106.1 | length 3.4
  Bottom Layer w0.4: U106.1@36.195,61.468 36.276,61.549 36.276,62.311 36.703,62.738 R126.2@38.613,62.738
NetR129_1: R129.1 U106.8 | length 6
  Bottom Layer w0.3: U106.8@30.526,61.3 32.045,61.3 33.467,59.878 R129.1@33.467,57.404
NetR201_1: R201.1 RS.5 RS.10 RS.11 | length 32.3
  Bottom Layer w1: RS.11@91.137,34.9 95.101,34.9 R201.1@95.253,35.052 ; R201.1@95.25,35.055 R201.1@95.253,35.052 ; RS.5@98.092,36.32 98.092,36.116 97.028,35.052 ; RS.10@116.127,34.9 116.127,34.212 112.776,30.861 98.298,30.861 97.028,32.131 97.028,35.052 ; R201.1@95.253,35.052 97.028,35.052
NetR205_1: R205.1 U201.7 | length 17.7
  Bottom Layer w0.4: R205.1@106.426,40.066 106.426,40.893 107.887,42.354 115.486,42.354 116.185,43.053 120.269,43.053
  Bottom Layer w0.5: 120.269,43.053 120.777,43.561 U201.7@120.777,44.945
NetR205_2: R205.2 RS.2 | length 2
  Bottom Layer w0.5: R205.2@106.426,38.166 106.402,38.142 RS.2@106.402,36.32 RS.2@106.492,36.41
NetRS_3: RS.3 U201.8 | length 28.3
  Bottom Layer w0.4: RS.3@103.632,36.32 103.632,35.179 103.886,34.925 110.236,34.925 110.744,35.433 110.744,41.275 111.169,41.7 120.694,41.7 121.285,42.291
  Bottom Layer w0.5: 121.285,42.291 122.047,43.053 U201.8@122.047,44.945
P\T\T\: Q2.3 R18.1 | length 1.8
  Bottom Layer w0.5: Q2.3@69.088,29.167 69.088,29.82 69.154,29.886 R18.1@69.154,30.861
  Bottom Layer w0.6: R18.1@69.088,30.927 R18.1@69.154,30.861
P\T\T\OUT: L2.1 Q3.3 | length 3.7
  Top Layer w0.5: Q3.3@64.135,43.434 64.135,43.028 v1(65.151,43.028)
  Bottom Layer w0.5: v1(65.151,43.028) 65.151,41.657 L2.1@66.04,41.657
PGC: Pp.5 U2.15 | length 31.6
  Top Layer w0.3: U2.15@108.839,53.365 107.95,54.253 107.95,54.61 108.331,54.991 109.728,54.991 110.236,55.499 v1@110.34,55.499
  Bottom Layer w0.5: Pp.5@99.695,39.751 99.568,39.751 98.044,38.227 96.647,38.227 95.901,38.973 95.901,41.06 v1@110.34,55.499
  other v1: 110.259,55.494
PGD: Pp.4 U2.16 | length 23.5
  Top Layer w0.3: U2.16@109.192,53.718 109.576,54.102 110.236,54.102 111.279,54.102 v1@111.529,54.351
  Bottom Layer w0.5: Pp.4@97.155,39.751 97.155,41.021 110.236,54.102 110.617,54.483 111.247,54.483 v1@111.252,54.478
  other v1: 111.252,54.356
PTT: Q3.1 R19.1 R49.2 U2.32 | length 90.4
  Top Layer w0.3: v1@103.124,62.332 U2.32@103.889,61.567
  Top Layer w0.5: v1(71.882,31.496) 71.882,33.325 71.226,33.981 70.176,33.981 ; R19.1@84.582,39.939 84.582,40.679 ; v1(84.582,60.477) 84.582,40.679 ; 65.634,45.644 65.085,45.644 Q3.1@65.085,45.634 65.634,45.644 ; 65.634,45.644 66.167,45.11 66.167,40.437 62.471,36.74 62.471,35.242 63.731,33.981 70.176,33.981 ; 70.176,33.981 71.298,35.103 76.28,35.103 79.387,38.21 79.387,40.132 80.188,40.933 84.328,40.933 84.582,40.679
  Bottom Layer w0.5: v1(71.882,31.496) 71.882,30.008 73.848,28.042 R49.2@73.848,27.178 ; v1(84.582,60.477) 86.766,62.662 102.946,62.662 v1(103.353,62.255)
RXD: U1.2 U2.50 | length 62.4
  Top Layer w0.3: 92.202,51.824 94.853,51.824 U2.50@96.393,53.365
  Top Layer w0.5: 92.202,51.824 90.747,51.824 88.654,53.917 88.654,61.28 91.255,63.881 96.274,63.881 101.227,68.834 101.227,93.033 100.024,94.236 U1.2@95.855,94.236
SCK1_OUT: J4.5 R41.1 U2.4 | length 144.1
  Top Layer w0.3: U2.4@104.949,49.476 106.045,48.38 106.045,47.625 v1(107.442,46.228)
  Top Layer w0.4: J4.5@38.986,100.255 38.986,98.047 42.291,94.742 v1@47.244,94.742 ; v1@47.371,94.742 R41.1@49.596,94.742
  Bottom Layer w0.4: v1@47.244,94.742 47.97,94.742 52.104,90.608 62.155,90.608 64.009,88.754 113.92,88.754 116.206,86.468 119.317,86.468 121.965,83.82 121.965,55.816 118.054,51.905 113.809,51.905 110.545,48.641 109.855,48.641 v1(107.442,46.228)
  other v1: 47.267,94.737
SD_C\P\: J4.9 R35.2 U2.29 | length 123.8
  Top Layer w0.3: U2.29@104.949,60.506 106.419,61.976 106.426,61.976 106.426,62.611
  Top Layer w0.4: J4.9@35.776,89.655 35.776,87.668 36.514,86.93 40.956,86.93 41.91,87.884 ; J4.9@41.476,89.655 41.476,88.318 41.91,87.884 ; R35.2@49.596,88.646 v1(47.498,88.646) 45.085,88.646 44.323,87.884 41.91,87.884
  Top Layer w0.5: 106.426,62.611 106.426,64.135 106.807,64.516 106.807,65.405 v1@106.934,65.532
  Bottom Layer w0.4: v1(47.498,88.646) 61.342,88.646 62.548,87.44 63.196,86.792 113.107,86.792 115.393,84.506 118.504,84.506 120.003,83.007 120.003,77.838 109.919,67.754 109.919,66.231 109.093,65.405 107.061,65.405 v1@106.934,65.532
  other v1: 106.957,65.4
SD_C\S\: J4.2 R38.2 U2.8 | length 141.9
  Top Layer w0.3: U2.8@106.364,50.89 107.469,49.784
  Top Layer w0.4: J4.2@35.686,100.255 35.686,95.807 39.672,91.821 v1(47.498,91.821) 47.498,91.186 48.006,90.678 R38.2@49.596,90.678 ; 107.469,49.784 108.966,49.784 v1(109.601,50.419)
  Bottom Layer w0.4: v1(47.498,91.821) 49.041,91.821 51.562,89.3 61.613,89.3 63.467,87.446 113.378,87.446 115.664,85.16 118.775,85.16 120.657,83.278 120.657,56.358 117.512,53.213 112.395,53.213 v1(109.601,50.419)
SD_PWRON: U2.28 U3.3 | length 112
  Top Layer w0.3: U2.28@105.303,60.153 107.442,62.292 107.442,62.738
  Top Layer w0.5: 107.442,62.738 107.442,63.627 108.712,64.897 v1(108.712,66.548)
  Bottom Layer w0.35: U3.3@40.062,93.03 41.209,93.03 46.522,87.717 61.382,87.717 62.103,86.995 62.288,86.811 62.936,86.163 112.847,86.163 115.133,83.877 118.244,83.877 119.374,82.747 119.374,78.098 108.712,67.436 v1(108.712,66.548)
SD_PWRSTAT: R40.2 U2.30 U3.4 | length 123.6
  Top Layer w0.3: U2.30@104.596,60.86 105.537,61.801 105.537,63.5
  Top Layer w0.4: R40.2@28.194,93.03 32.959,93.03 33.147,93.091 33.208,93.03
  Top Layer w0.5: 105.537,63.5 v1(105.537,66.167)
  Bottom Layer w0.4: 33.208,93.03 U3.4@37.662,93.03 37.662,92.005 38.354,91.313 41.91,91.313 46.135,87.088 61.121,87.088 62.675,85.534 112.586,85.534 114.872,83.248 117.983,83.248 118.745,82.486 118.745,78.359 108.204,67.818 107.188,67.818 v1(105.537,66.167)
SD_SDI1: J4.7 R36.2 U2.6 | length 143.4
  Top Layer w0.3: U2.6@105.834,50.005 106.817,49.022 107.95,49.022 108.585,48.387 v1(112.141,48.387)
  Top Layer w0.4: v1(45.72,96.012) 47.498,96.012 48.26,96.774 R36.2@49.596,96.774
  Top Layer w0.5: J4.7@41.186,100.255 41.186,97.498 42.672,96.012 v1(45.72,96.012)
  Bottom Layer w0.4: v1(45.72,96.012) 47.752,96.012 52.502,91.262 62.426,91.262 63.445,90.242 64.28,89.408 114.191,89.408 116.477,87.122 119.588,87.122 122.619,84.091 122.619,55.545 118.325,51.251 114.08,51.251 112.141,49.312 v1(112.141,48.387)
SD_SDO1: J4.3 R37.2 U2.5 | length 144.9
  Top Layer w0.3: U2.5@105.303,49.829 107.253,47.879 v1(107.315,47.879)
  Top Layer w0.4: J4.3@36.786,100.255 36.786,97.405 40.846,93.345 v1(45.72,93.345) 48.006,93.345 48.641,92.71 R37.2@49.596,92.71
  Bottom Layer w0.4: v1(45.72,93.345) 48.442,93.345 51.833,89.954 61.884,89.954 62.9,88.937 63.738,88.1 113.649,88.1 115.935,85.814 119.046,85.814 121.311,83.549 121.311,56.087 117.783,52.559 113.538,52.559 110.382,49.403 108.839,49.403 v1(107.315,47.879)
TEMPERATURE: C42.1 U2.22 U4.2 | length 14.4
  Top Layer w0.3: U2.22@107.424,58.032 111.623,62.23 111.623,62.601 112.331,63.309
  Top Layer w0.4: 112.331,63.309 114.935,65.913 C42.1@116.657,65.913
  Top Layer w0.5: C42.1@116.657,65.913 U4.2@116.657,67.63
TXD: U1.3 U2.49 | length 60.4
  Top Layer w0.3: 93.853,54.102 95.631,54.102 96.015,53.718 U2.49@96.04,53.718
  Top Layer w0.5: 93.853,54.102 90.678,54.102 89.408,55.372 89.408,60.968 91.567,63.127 96.586,63.127 101.981,68.522 101.981,93.345 100.279,95.047 97.602,95.047 97.313,95.336 U1.3@95.855,95.336
pads on no net: B2.MH1 B2.MH2 D6.2 D7.2 J3.MH J4.1 J4.8 J5.MH LED1.MHx LED1.MHy Pp.6 RS.1 RS.4 RS.6 RS.7 RS.8 RS.9 Sw1. Sw1.3 Sw1.MH U1.5 U1.7 U1.14 U1.15 U1.16 U1.17 U1.18 U2.1 U2.2 U2.11 U2.13 U2.14 U2.17 U2.18 U2.23 U2.24 U2.27 U2.33 U2.34 U2.35 U2.36 U2.37 U2.39 U2.40 U2.45 U2.46 U2.47 U2.48 U2.51 U2.57 U2.60 U2.62 U2.63 U2.64 U101.5 U101.7 U106.3 U201.9 U201.10 U201.11 U201.12 U201.13 U201.14

## Polygon pours and split planes (outlines as drawn)
GND on Top Layer "topGND" (solid, remove dead copper): 26.035,29.845 29.845,26.035 121.285,26.035 124.46,29.21 124.46,102.87 122.555,104.775 98.298,104.775 78.105,104.775 77.851,105.029 77.724,105.156 67.691,105.156 67.31,104.775 27.94,104.775 26.035,102.87
+LI on Top Layer "+Li TOP to DC" (solid, remove dead copper, pour order 1005): 95.377,77.597 95.377,76.454 93.853,74.93 93.472,74.549 91.44,74.549 91.44,75.184 88.9,77.724 84.455,82.169 81.28,82.169 78.232,82.169 76.835,80.772 76.073,80.01 61.468,80.01 57.277,80.01 54.737,82.55 53.848,83.439 43.688,83.439 43.053,83.439 41.783,82.169 40.894,81.28 40.894,80.391 40.894,79.502 40.64,79.248 39.497,79.248 38.862,79.883 39.116,80.137 39.116,81.661 39.37,81.661 40.132,82.423 43.434,85.725 44.958,85.725 56.388,85.725 58.547,83.566 58.674,83.693 91.694,83.693 92.329,83.693 94.361,81.661 95.377,80.645 95.377,77.851
+LI on Top Layer "+Li DC" (solid, remove dead copper, pour order 1004): 41.021,71.374 41.021,70.358 41.021,70.104 40.767,69.85 38.608,69.85 37.338,69.85 36.449,70.739 36.322,70.866 36.322,80.01 36.322,80.137 37.973,81.788 40.64,81.788 40.767,81.788 41.021,81.534 41.021,78.74 41.021,76.073 40.513,75.565 39.878,75.565 39.624,75.565 38.989,74.93 38.989,72.898 38.989,72.136 39.37,71.755 39.497,71.628 40.767,71.628
+3V3 on Top Layer "+3Vv GPS" (solid, remove dead copper, pour order 1003): 97.663,100.457 97.917,100.203 100.838,100.203 101.219,100.584 101.219,103.378 101.219,103.505 101.092,103.632 99.695,103.632 99.314,103.632 98.425,102.743 98.171,102.489 98.171,101.854 98.171,101.6 97.663,101.092
+3V3 on Top Layer "+3V3_t" (solid, remove dead copper, pour order 1002): 48.768,62.865 48.768,62.484 48.895,62.357 49.022,62.23 50.165,62.23 50.546,62.23 50.927,61.849 51.435,61.341 51.562,61.341 57.023,61.341 57.912,60.452 61.341,60.452 61.722,60.833 61.722,62.992 61.722,63.246 60.579,64.389 50.292,64.389
+LI on Top Layer "+Li_at bat+" (solid, remove dead copper, pour order 1001): 98.679,80.01 100.203,78.486 100.203,69.723 97.155,66.675 92.075,66.675 91.567,67.183 91.567,69.469 91.313,69.723 89.916,69.723 88.9,70.739 88.9,77.724 88.9,77.978 91.059,80.137 91.186,80.264 98.425,80.264
B_GND on Top Layer "B_GND_3" (solid, remove dead copper, pour order 1000): 28.575,70.485 27.813,71.247 27.813,73.406 27.813,78.486 28.702,79.375 28.829,79.375 30.48,79.375 31.115,78.74 33.782,78.74 35.306,77.216 35.433,77.089 35.433,69.596 35.433,69.469 35.814,69.088 38.227,69.088 38.608,68.707 38.608,66.929 38.227,66.548 36.83,66.548 35.306,68.072 34.163,68.072 33.909,68.326 31.75,70.485
NetC29_2 on Top Layer "RF down" (solid, remove dead copper, pour order 1000): 86.36,101.155 84.455,101.155 84.074,101.473 83.82,101.473 82.804,101.473 82.677,101.367 82.677,101.155 82.677,100.415 82.931,100.203 84.074,100.203 84.455,100.52 86.36,100.52
NetC109_2 on Top Layer "in 3V3" (solid, remove dead copper, pour order 1000): 48.768,54.229 48.514,53.975 46.482,53.975 45.085,55.372 45.085,58.039 44.831,58.293 42.545,58.293 41.91,58.928 41.91,62.23 43.434,63.754 47.117,63.754 47.879,62.992 47.879,62.103 47.879,61.849 48.26,61.468 48.387,61.341 48.387,58.166 48.387,55.88 48.514,55.753 48.768,55.499
+4.5V on Top Layer "4v5" (solid, remove dead copper, pour order 1001): 51.435,55.499 51.308,55.499 50.8,54.991 50.8,49.911 51.181,49.53 53.848,49.53 60.071,49.53 61.595,51.054 61.595,52.959 61.341,53.213 55.88,53.213 55.626,53.213 53.34,55.499
GND on Top Layer "gnd_1" (solid, remove dead copper, pour order 1003): 50.165,51.689 49.784,51.308 49.657,51.308 48.768,51.308 48.387,51.689 48.387,53.213 49.149,53.975 49.149,55.753 49.149,56.134 49.022,56.261 49.022,57.277 49.022,58.674 48.895,58.801 48.895,58.928 48.895,59.944 49.022,60.071 50.546,60.071 51.181,60.706 51.308,60.706 56.642,60.706 56.896,60.452 57.404,59.944 58.42,59.944 61.341,59.944 61.722,59.563 61.722,54.61 61.722,54.229 61.341,53.848 61.214,53.721 59.436,53.721 56.261,53.721 53.848,56.134 51.181,56.134 50.546,56.134 49.911,55.499 49.784,55.372 49.784,53.975 49.784,53.848 50.165,53.467
GND on Bottom Layer "Bot GND" (solid, remove dead copper): 26.035,29.845 29.845,26.035 121.285,26.035 124.46,29.21 124.46,102.87 122.555,104.775 78.105,104.775 77.724,105.156 77.343,105.156 67.691,105.156 67.564,105.029 67.31,104.775 66.675,104.775 27.94,104.775 26.035,102.87
GND on Bottom Layer "gndDC" (solid, remove dead copper, pour order 1015): 42.164,72.771 41.783,72.39 41.656,72.39 39.878,72.39 39.751,72.517 39.497,72.771 39.497,73.152 39.497,74.168 39.497,74.676 39.751,74.93 40.386,74.93 40.513,74.93 41.529,73.914 41.656,73.787 41.91,73.787 42.037,73.787 42.164,73.66
NetC38_2 on Bottom Layer "+3sw SD" (solid, remove dead copper, pour order 1014): 36.957,94.996 36.957,94.742 37.084,94.615 38.227,94.615 38.481,94.869 38.481,98.298 38.481,98.425 38.1,98.806 37.846,98.806 35.687,98.806 34.925,98.044 34.925,96.774 34.925,96.266 35.052,96.139 35.179,96.012 36.576,96.012 36.957,95.631
+3V3 on Bottom Layer "+3V3 SD" (solid, remove dead copper, pour order 1013): 39.243,94.996 39.243,94.742 39.37,94.615 40.64,94.615 40.767,94.742 40.767,95.885 40.894,95.885 41.148,96.139 43.434,96.139 43.561,96.139 43.815,96.393 44.069,96.647 44.069,97.282 44.069,97.409 43.688,97.79 43.434,98.044 40.132,98.044 39.624,98.044 39.116,97.536 38.989,97.409 38.989,95.25
+4.5V on Bottom Layer "+4V5_b" (solid, remove dead copper, pour order 1012): 50.8,52.959 50.8,50.038 51.181,49.657 55.118,49.657 65.786,49.657 66.675,50.546 66.802,50.673 66.802,52.959 66.802,53.086 66.548,53.34 66.421,53.467 61.722,53.467 61.341,53.086 59.182,53.086 59.055,53.086 58.674,53.467 56.388,53.467 56.007,53.467 54.864,54.61 52.451,54.61 52.07,54.61 50.8,53.34
+3V3 on Bottom Layer "+3V3_b1" (solid, remove dead copper, pour order 1011): 51.562,64.008 51.562,63.119 51.816,62.865 55.245,62.865 56.896,62.865 59.182,60.579 61.214,60.579 61.341,60.579 61.468,60.706 61.468,62.484 61.468,62.738 60.325,63.881 59.69,64.516 56.515,64.516 56.388,64.516 55.753,65.151 55.753,67.945 55.753,68.072 54.483,69.342 54.356,69.469 52.451,69.469 50.673,69.469 49.911,68.707 49.911,68.072 50.038,67.945 50.165,67.818 53.34,67.818 53.848,67.31 53.848,65.405 53.848,65.151 53.34,64.643 53.213,64.516 52.07,64.516
+LI on Bottom Layer "+Li_at bat" (solid, remove dead copper, pour order 1010): 92.075,66.675 91.567,67.183 91.567,67.437 91.567,68.961 91.313,69.215 91.313,69.469 91.059,69.723 90.678,69.723 89.916,69.723 89.535,70.104 88.9,70.739 88.9,71.247 88.9,77.724 91.059,79.883 91.186,80.01 96.52,80.01 98.679,80.01 99.695,78.994 100.203,78.486 100.203,70.485 100.203,69.723 97.155,66.675
B_GND on Bottom Layer "B_GND_2" (solid, remove dead copper, pour order 1009): 34.29,69.342 35.56,69.342 35.814,69.088 37.338,69.088 38.227,69.088 38.608,68.707 38.608,66.929 38.227,66.548 36.83,66.548 35.814,67.564 35.179,68.199 35.052,68.199 34.417,68.199 34.29,68.326 34.163,68.453 34.163,68.707 34.163,69.215
M_GND on Bottom Layer "M_GND" (solid, remove dead copper, pour order 1008): 35.179,67.818 36.068,66.929 36.068,64.008 35.56,63.5 32.385,63.5 31.75,64.135 29.083,64.135 28.702,64.516 28.702,66.802 29.21,67.31 30.988,67.31 31.242,67.31 31.75,67.818
+LI on Bottom Layer "+Li_4" (solid, remove dead copper, pour order 1007): 40.005,71.628 41.91,71.628 42.164,71.374 42.164,70.739 41.783,70.358 38.735,70.358 37.973,69.596 35.687,69.596 35.433,69.85 35.433,71.12 35.814,71.501 37.211,71.501 37.592,71.882 37.465,72.009 37.465,77.47 37.465,77.851 38.227,78.613 38.989,78.613 39.37,78.232 39.497,78.105 39.497,75.946 38.989,75.438 38.989,72.644
B_GND on Bottom Layer "B_gnd" (solid, remove dead copper, pour order 1006): 34.036,74.803 34.163,74.676 34.163,73.025 33.909,72.771 33.782,72.771 33.401,72.771 33.147,73.025 33.02,73.152 31.75,73.152 31.496,72.898 31.496,72.009 31.369,71.882 30.099,71.882 29.845,71.882 29.464,71.501 28.829,70.866 28.702,70.866 27.94,70.866 27.813,70.993 27.813,77.343 27.813,78.486 28.702,79.375 30.48,79.375 31.115,78.74 31.115,77.47 31.115,77.216 30.607,76.708 30.734,76.581 30.734,75.184 30.988,74.93 31.115,74.803 31.242,74.803
NetC109_2 on Bottom Layer "botLayer 109_2" (solid, remove dead copper, pour order 1001): 50.8,58.982 50.065,58.166 45.971,58.166 44.081,58.166 43.871,58.399 42.926,59.449 42.926,60.732 42.926,62.481 44.186,63.881 44.396,63.881 49.75,63.881 50.8,62.715
NetQ105_1 on Bottom Layer "BOT Layer +Q105" (solid, remove dead copper, pour order 1004): 85.532,73.025 88.199,73.025 88.453,72.771 88.453,69.85 87.818,69.215 87.691,69.088 85.278,69.088 84.643,68.453 84.643,66.802 83.881,66.04 69.149,66.04 68.514,66.675 68.514,68.326 68.514,68.453 68.895,68.834 73.467,68.834 78.293,68.834 78.674,68.453 79.055,68.453 79.563,67.945 80.452,67.056 80.706,67.056 82.865,67.056 83.246,67.437 83.246,67.818 83.246,71.247 84.262,72.263 85.024,72.263 85.024,72.517 85.532,73.025
NetC123_2 on Bottom Layer "Sw" (solid, remove dead copper, pour order 1004): 48.26,72.898 48.133,72.771 47.117,72.771 46.99,72.898 46.99,73.787 46.99,73.914 46.101,74.803 44.704,74.803 44.577,74.93 44.577,78.74 44.704,78.867 46.228,78.867 46.355,78.74 46.355,76.835 46.355,76.581 46.736,76.2 47.879,76.2 48.006,76.073 48.006,73.914 48.006,73.787 48.26,73.533
NetC123_1 on Bottom Layer "Sw2" (solid, remove dead copper, pour order 1005): 48.514,72.517 48.514,72.39 49.022,71.882 49.53,71.882 49.657,72.009 49.657,74.295 50.038,74.676 50.038,75.819 50.927,76.708 51.308,76.708 51.435,76.708 51.562,76.835 51.562,78.232 51.435,78.359 47.371,78.359 47.244,78.232 47.244,76.835 47.371,76.708 48.514,76.708 48.641,76.581 48.641,74.676 48.641,76.581 48.514,76.708
GND on Bottom Layer "gnd2" (solid, remove dead copper, pour order 1006): 46.99,72.517 48.133,72.517 48.26,72.39 48.26,72.263 48.387,72.136 49.022,71.501 49.276,71.501 49.403,71.374 49.403,69.596 49.149,69.342 48.641,69.342 48.26,69.723 48.26,71.628 48.006,71.882 46.99,71.882 46.863,71.755 46.99,71.628 46.99,69.215 46.863,69.088 46.863,67.31 46.736,67.183 46.609,67.056 45.466,67.056 44.831,67.691 44.704,67.818 44.704,69.723 44.704,70.104 44.958,70.358 45.466,70.358 45.72,70.358 45.974,70.612 45.974,72.263 45.974,72.39 46.101,72.517
+LI on Bottom Layer "+li_1" (solid, remove dead copper, pour order 1007): 45.974,73.914 46.228,73.66 46.228,73.025 45.974,72.771 44.577,72.771 44.196,72.39 42.926,72.39 42.799,72.39 42.672,72.517 42.672,74.422 42.291,74.803 41.275,74.803 40.894,75.184 40.894,81.28 41.148,81.534 42.418,81.534 42.545,81.407 42.545,79.375 42.799,79.121 42.799,75.184 42.926,75.057 43.815,74.168 45.72,74.168 45.974,73.914
+3V3 on Bottom Layer "+3v3_2" (solid, remove dead copper, pour order 1008): 49.403,67.691 52.959,67.691 53.086,67.818 53.086,68.199 53.086,69.215 52.705,69.596 52.705,70.612 52.705,75.565 52.451,75.819 51.054,75.819 50.419,75.184 50.419,74.422 50.165,74.168 49.911,73.914 49.784,73.914 49.784,71.882 50.038,71.628 50.038,69.342 49.657,68.961 49.403,68.707 49.403,68.58
GND on Bottom Layer "Bot GND" (solid, remove dead copper, shelved): 123.19,105.156 123.19,104.648 125.095,102.743 125.095,27.305 125.095,27.051 123.698,25.654 27.432,25.654 25.654,27.432 25.654,102.235 25.654,103.251 27.559,105.156

## Other copper
Top Layer:
  pour cut-out: 44.704,79.502 44.323,79.121 44.323,74.93 45.085,74.168 46.228,74.168 46.736,73.66 46.736,72.898 46.99,72.644 48.133,72.644 49.022,71.755 49.403,71.755 49.53,71.882 49.53,73.914 50.165,74.549 50.165,75.692 50.927,76.454 51.562,76.454 51.816,76.708 51.816,78.613 50.927,79.502
  pour cut-out: 94.361,102.743 94.742,102.362 94.742,92.837 94.361,92.456 87.376,92.456 86.868,92.964 86.868,101.473 88.138,102.743
  pour cut-out: 42.291,102.489 42.545,102.235 42.545,101.854 43.434,100.965 43.434,90.678 42.926,90.17 42.672,90.17 42.545,90.297 42.545,90.805 42.291,91.059 40.767,91.059 40.386,90.678 40.386,89.789 39.751,89.789 39.751,90.678 39.37,91.059 37.846,91.059 37.465,90.678 37.465,89.789 36.83,89.789 36.83,90.678 36.449,91.059 35.179,91.059 34.798,90.678 34.798,89.789 34.163,89.789 34.036,89.916 34.036,90.805 33.782,91.059 32.131,91.059 31.75,90.678 31.75,89.916 30.48,89.916 29.972,90.424 29.972,102.235 30.861,103.124 30.861,103.759 31.242,104.14 32.004,104.14 34.163,101.981 41.148,101.981 41.656,102.489
  pour cut-out: 32.893,33.528 35.433,33.528 35.941,33.02 35.941,30.099 35.56,29.718 32.893,29.718 32.258,30.353 32.258,32.893